# EAGLE board belichter-timer (EAGLE 6.5.0)
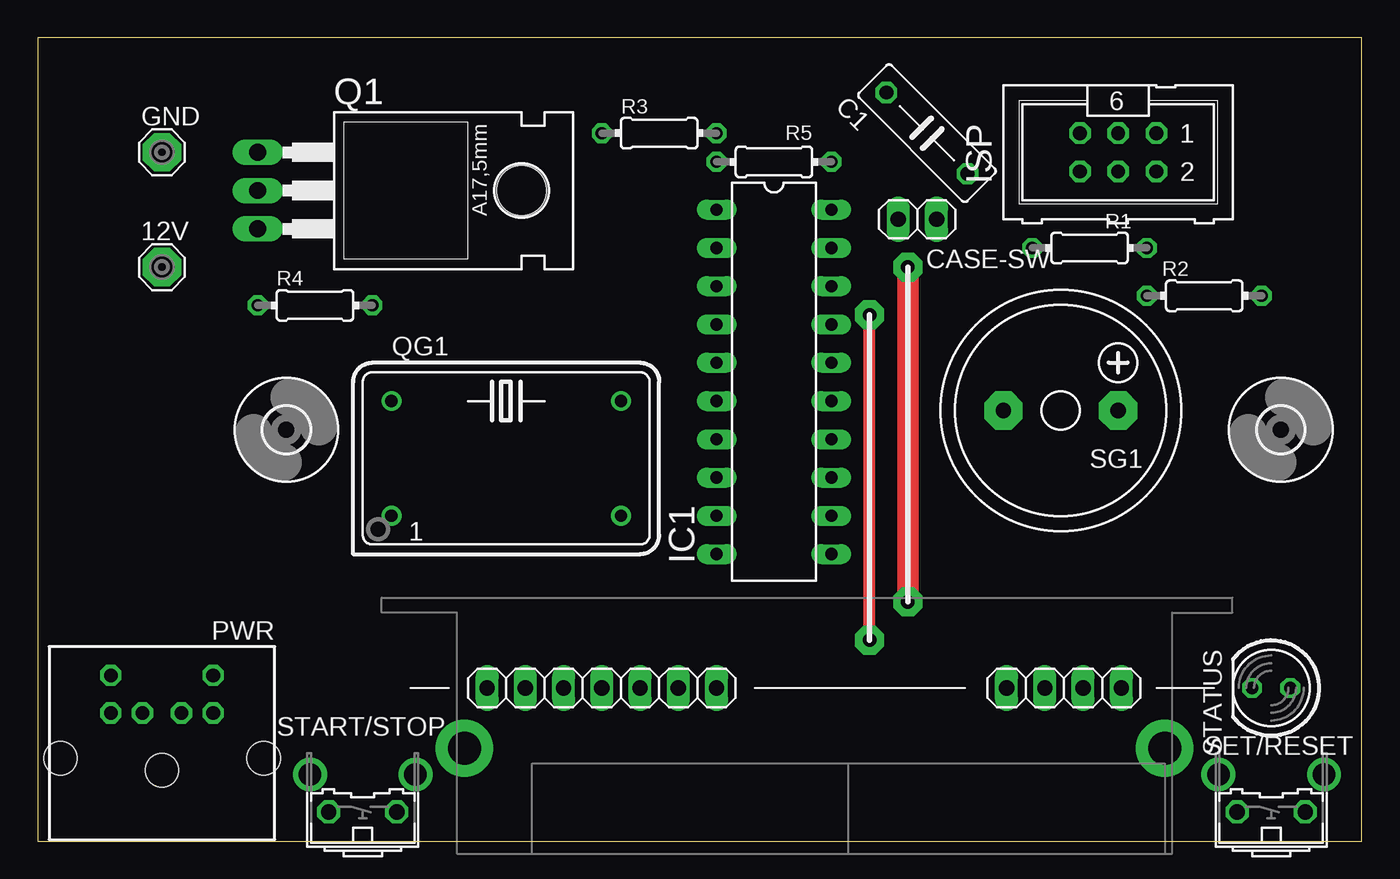
[diagram p0: board, top side]
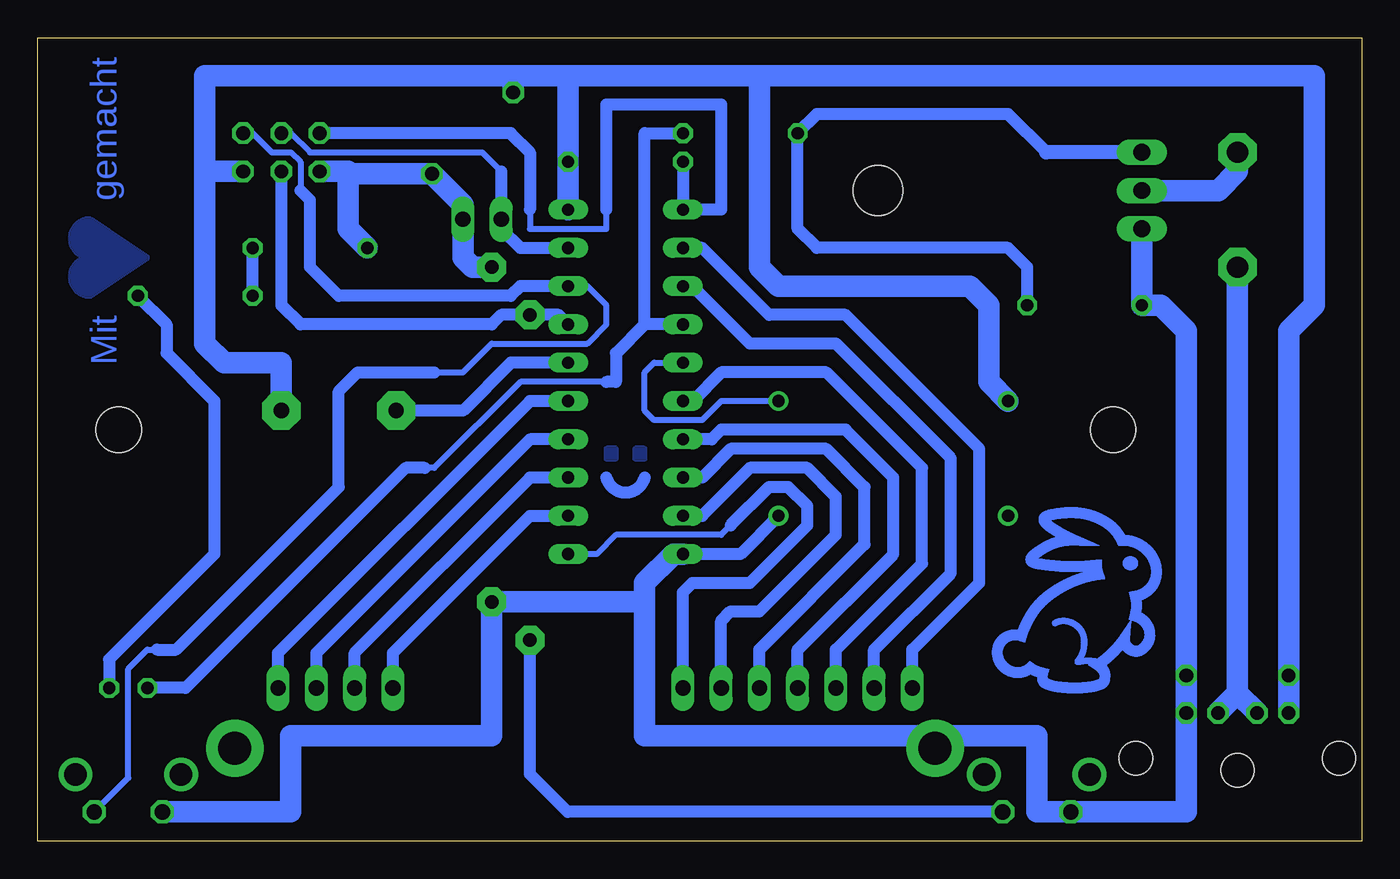
[diagram p1: board, bottom side, seen from below]

Size 87.94 x 53.33 mm. Coordinates in mm from the lower left corner, seen from the top.
Outline: 0,0 87.94,0 87.94,53.33 0,53.33 0,0
Copper layers (1*16): Top 0.035mm / dielectric 1.5mm / Bottom 0.035mm
Design rules "default *": minimum track width 10mil, minimum drill 24mil, track to track 8mil, track to pad 8mil, pad to pad 8mil, via to via 8mil, smd to smd 8mil, copper to edge 40mil, drill to drill 8mil, minimum pad ring 10mil, minimum via ring 8mil, stop-mask expansion 4mil, vias tented up to drill 0mil, thermal gap 10mil

## Footprints (pad centres in the part's own frame; a part is rotated, then mirrored left to right if it is on the bottom)
SE14 = drill 1.397 pad 2.54 octagon: MP 0,0
C075-032X103 = drill 0.914 octagon: 1 -3.81,0; 2 3.81,0
1X02 = drill 1.016 long: 1 -1.27,0; 2 1.27,0
3,0 = hole 3: 0,0
DIL20 = drill 0.813 long: 1 -11.43,-3.81; 2 -8.89,-3.81; 3 -6.35,-3.81; 4 -3.81,-3.81; 5 -1.27,-3.81; 6 1.27,-3.81; 7 3.81,-3.81; 8 6.35,-3.81; 9 8.89,-3.81; 10 11.43,-3.81; 11 11.43,3.81; 12 8.89,3.81; 13 6.35,3.81; 14 3.81,3.81; 15 1.27,3.81; 16 -1.27,3.81; 17 -3.81,3.81; 18 -6.35,3.81; 19 -8.89,3.81; 20 -11.43,3.81
ML6 = drill 0.914 octagon: 1 -2.54,-1.27; 2 -2.54,1.27; 3 0,-1.27; 4 0,1.27; 5 2.54,-1.27; 6 2.54,1.27
MDIN06SS = drill 0.9 octagon: 1 1.3,8.5; 2 -1.3,8.5; 3 3.4,8.5; 4 -3.4,8.5; 5 3.4,11; 6 -3.4,11 | hole 2.2: -6.75,5.5; 0,4.7; 6.75,5.5
TO220BH = drill 1.118 long: D 0,-6.35; G -2.54,-6.35; S 2.54,-6.35 | hole 3.302: 0,11.176
DIL14S = drill 0.813: 1 -7.62,-3.81; 7 7.62,-3.81; 8 7.62,3.81; 14 -7.62,3.81
0204/7 = drill 0.813 octagon: 1 -3.81,0; 2 3.81,0
B3F-31XX = drill 1.016 octagon: 1 -2.261,-1.245; 2 2.261,-1.245 | drill 1.499 pad 2.159: 3 -3.505,1.245; 4 3.505,1.245
F/HMB = drill 1.016 pad 2.54 octagon: + 3.81,0; - -3.81,0
LED5MM = drill 0.813 octagon: A -1.27,0; K 1.27,0
LED-DSP = drill 1.016 long: 1 0,0; 2 2.54,0; 3 5.08,0; 4 7.62,0; 5 10.16,0; 6 12.7,0; 7 15.24,0; 8 34.5,0; 9 37.04,0; 10 39.58,0; 11 42.12,0 | drill 2.2 pad 3.81: P$1 -1.5,-4; P$2 45,-4

## Placement (x,y rotation side)
12V  SE14  [SE14]  8.26,38.1 0 top
C1  47nF  [C075-032X103]  59.05,46.99 135 top
CASE-SW  [1X02]  58.42,41.28 0 top
GND  SE14  [SE14]  8.26,45.72 0 top
H1  MOUNT-HOLE3.0  [3,0]  82.55,27.3 0 top
H2  MOUNT-HOLE3.0  [3,0]  16.51,27.3 0 top
IC1  ATTINY2313-20PU  [DIL20]  48.89,30.48 270 top
ISP  [ML6]  71.76,45.72 180 top
PWR  [MDIN06SS]  8.26,0 0 top
Q1  IRLZ34N  [TO220BH]  20.96,43.18 270 top
QG1  4MHz  [DIL14S]  31.12,25.4 0 top
R1  100  [0204/7]  69.85,39.37 180 top
R2  100  [0204/7]  77.47,36.2 180 top
R3  100  [0204/7]  41.27,46.99 180 top
R4  10k  [0204/7]  18.42,35.56 0 top
R5  10k  [0204/7]  48.89,45.09 0 top
SET/RESET  [B3F-31XX]  81.92,3.17 0 top
SG1  F/HMB  [F/HMB]  67.95,28.57 0 top
START/STOP  [B3F-31XX]  21.59,3.17 0 top
STATUS  GREEN  [LED5MM]  81.92,10.16 180 top
TIME  LED-DSP  [LED-DSP]  29.85,10.16 0 top

## Library data of the parts
12V GND = solpad
C1 R1-R5 = rcl
CASE-SW = pinhead
H1 H2 = holes
IC1 = atmel; OC_FARNELL: unknown; OC_NEWARK: unknown
ISP = con-harting-ml; OC_FARNELL: unknown; OC_NEWARK: unknown
PWR = con-yamaichi; OC_FARNELL: unknown; OC_NEWARK: unknown
Q1 = transistor-power
QG1 = crystal; OC_FARNELL: unknown; OC_NEWARK: unknown
SET/RESET START/STOP = switch-omron; MPN: B3F-3100; OC_FARNELL: 959704; OC_NEWARK: 36M3582
SG1 = buzzer; OC_FARNELL: unknown; OC_NEWARK: unknown
STATUS = led
TIME = led-display

## Nets
+12V: 12V.MP PWR.1 PWR.2
CLK: IC1.5 QG1.8
DP0: IC1.11 TIME.7
DP1: IC1.9 TIME.6
DP2: IC1.8 TIME.5
DP3: IC1.7 TIME.4
DP4: IC1.6 TIME.3
DP5: IC1.3 TIME.2
DP6: IC1.2 TIME.1
DPA: IC1.15 TIME.11
DPB: IC1.14 TIME.10
DPC: IC1.13 TIME.9
DPD: IC1.12 TIME.8
GND: C1.1 CASE-SW.2 IC1.10 ISP.6 PWR.3 PWR.5 Q1.S QG1.7 R1.2 R4.1 SET/RESET.1 START/STOP.1
LOAD_GND: GND.MP Q1.D
MISO: IC1.18 ISP.1 SET/RESET.2
MOSI: IC1.17 ISP.4 START/STOP.2
N$2: R2.1 STATUS.A
N$3: R1.1 R2.2
N$6: Q1.G R3.2 R4.2
RESET: IC1.1 ISP.5 R5.1
SCK: CASE-SW.1 IC1.19 ISP.3
SND: IC1.16 SG1.-
STATUS: IC1.4 R3.1 STATUS.K
VCC: C1.2 IC1.20 ISP.2 PWR.4 PWR.6 QG1.14 R5.2 SG1.+

## Tracks (layer width: path | path; a pad name or v marks a point on that pad's centre or on a via)
+12V
  Bottom 1.422: 12V.MP 8.26,9.8 | 8.26,9.8 PWR.2 | 8.26,9.8 PWR.1
CLK
  Bottom 0.406: QG1.8 42.54,29.21 43.81,27.94 46.99,27.94 47.62,28.57 47.62,31.11 46.99,31.75 IC1.5
DP0
  Bottom 0.406: 41.91,20.95 42.54,20.32 49.53,20.32 50.8,19.05 IC1.11
  Bottom 0.813: TIME.7 45.09,16.51 44.45,17.14 40.64,17.14 36.83,20.95 36.83,22.22 38.1,23.5 39.37,23.5 41.91,20.95
DP1
  Bottom 0.813: TIME.6 42.54,14.61 41.91,15.24 40,15.24 34.92,20.32 34.92,22.86 36.83,24.77 40.64,24.77 43.81,21.59 IC1.9
DP2
  Bottom 0.813: TIME.5 40,12.7 33.02,19.68 33.02,23.5 35.56,26.04 41.91,26.04 43.81,24.13 IC1.8
DP3
  Bottom 0.813: TIME.4 37.46,12.7 31.12,19.05 31.12,24.13 34.29,27.3 42.54,27.3 43.18,26.67 IC1.7
DP4
  Bottom 0.813: TIME.3 34.92,12.7 29.21,18.41 29.21,24.77 35.56,31.11 42.54,31.11 44.45,29.21 IC1.6
DP5
  Bottom 0.813: TIME.2 32.38,12.7 27.31,17.78 27.31,25.4 34.92,33.02 40.64,33.02 44.45,36.83 IC1.3
DP6
  Bottom 0.813: TIME.1 29.85,12.7 25.4,17.14 25.4,26.04 34.29,34.93 39.37,34.93 43.81,39.37 IC1.2
DPA
  Bottom 0.813: IC1.15 55.24,29.21 71.97,12.49 TIME.11
DPB
  Bottom 0.813: IC1.14 55.24,26.67 69.43,12.49 TIME.10
DPC
  Bottom 0.813: IC1.13 55.24,24.13 66.89,12.49 TIME.9
DPD
  Bottom 0.813: TIME.8 64.34,12.49 55.24,21.59 IC1.12
GND  (via drill 0.9 pad 1.93)
  Top 1.422: v57.78,38.1 v57.78,15.88
  Bottom 0.813: QG1.7 41.27,19.05 IC1.10
  Bottom 1.422: Q1.S R4.1 13.33,35.56 11.65,33.88 PWR.5 PWR.3 11.65,1.93 START/STOP.1 21.59,1.93 21.59,6.98 47.62,6.98 47.62,15.88 | IC1.10 45.72,19.05 47.62,17.14 47.62,15.88 | 47.62,15.88 v57.78,15.88 57.78,6.98 71.12,6.98 71.12,1.93 SET/RESET.1 | v57.78,38.1 59.05,38.1 59.69,38.74 CASE-SW.2 59.69,42.24 C1.1 67.16,44.3 67.31,44.45 | 67.31,44.45 ISP.6 | R1.2 67.31,40.64 67.31,44.45
LOAD_GND
  Bottom 1.422: Q1.D 9.53,43.18 8.26,44.45 GND.MP
MISO
  Bottom 0.406: 70.48,43.18 70.48,45.09 71.12,45.72 72.39,45.72 73.66,46.99 ISP.1 | SET/RESET.2 81.92,4.19 81.92,11.43 80.65,12.7 80.01,12.7 | 61.59,31.11 59.69,31.11 57.78,33.02 51.43,33.02 50.16,34.29 50.16,35.56 51.43,36.83 IC1.18
  Bottom 0.813: IC1.18 55.88,36.83 56.52,36.2 67.95,36.2 69.85,38.1 69.85,42.55 70.48,43.18 | 80.01,12.7 78.74,12.7 67.95,23.5 67.95,29.84 66.68,31.11 61.59,31.11
MOSI  (via drill 0.9 pad 1.93)
  Top 0.813: v55.24,13.33 v55.24,34.93
  Bottom 0.813: IC1.17 53.34,34.93 v55.24,34.93 57.15,34.93 57.78,34.29 70.48,34.29 71.76,35.56 ISP.4 | START/STOP.2 52.73,1.93 55.24,4.45 v55.24,13.33
N$1
  pour Bottom: 47.62,26.04 48.26,26.04 48.26,25.4 47.62,25.4
N$2
  Bottom 0.813: R2.1 79.38,34.29 79.38,32.38 76.2,29.21 76.2,19.05 83.19,12.06 STATUS.A
N$3
  Bottom 0.813: R2.2 R1.1
N$4
  pour Bottom: 80.65,38.74 84.45,41.28 arc-90 85.73,40.01 arc-90 84.45,38.74 arc-90 85.73,37.47 arc-90 84.45,36.2
N$5
  pour Bottom: 49.53,26.04 50.16,26.04 50.16,25.4 49.53,25.4
N$6
  Bottom 0.813: 20.96,45.72 23.5,48.26 36.2,48.26 R3.2 37.46,40.64 36.2,39.37 23.5,39.37 22.23,38.1 R4.2
  Bottom 0.914: Q1.G 20.96,45.72
N$7
  Bottom 0.813: 50.16,24.13 arc-152 47.62,24.13
RESET
  Bottom 0.406: 50.16,41.91 50.16,40.64 55.24,40.64 55.24,41.91
  Bottom 0.813: R5.1 IC1.1 42.54,41.91 42.54,48.9 50.16,48.9 50.16,41.91 | 55.24,41.91 55.24,45.72 56.52,46.99 ISP.5
SCK
  Bottom 0.406: 57.15,44.45 58.42,45.72 69.85,45.72 71.12,46.99 ISP.3
  Bottom 0.813: 57.15,44.45 CASE-SW.1 57.15,40.64 55.88,39.37 IC1.19
SND
  Bottom 0.813: IC1.16 56.52,31.75 59.69,28.57 SG1.-
STATUS
  Bottom 0.406: 50.16,30.48 55.88,30.48 61.59,24.77 62.23,24.77
  Bottom 0.813: 47.62,34.29 47.62,46.99 R3.1 | IC1.4 47.62,34.29 | 47.62,34.29 49.53,32.38 49.53,30.48 50.16,30.48 | 62.23,24.77 63.5,24.77 78.11,10.16 STATUS.K
VCC
  Bottom 1.422: PWR.4 PWR.6 4.85,33.88 3.17,35.56 3.17,50.8 40,50.8 | IC1.20 R5.2 52.7,50.8 | QG1.14 24.77,30.48 24.77,35.56 26.04,36.83 38.73,36.83 40,38.1 40,50.8 | 76.84,44.45 76.84,33.02 75.57,31.75 71.76,31.75 SG1.+ | 76.84,44.45 76.84,50.8 56.52,50.8 | 40,50.8 52.7,50.8 | 52.7,50.8 56.52,50.8 | C1.2 56.36,50.65 56.52,50.8 | ISP.2 76.84,44.45
(copper drawn outside any net)
  shapes: Bottom area x2609

## Text on the board
Bottom: gemacht | Mit